# Altium PCB KNX_MCU_16CH_V1.2.PcbDoc (part 2 of 2)
Units mm, origin at the board's own origin, x right, y up, seen from the top; angles counter-clockwise.
Board outline 146.28 x 64.4 mm, 2 copper layers (F.Cu, B.Cu), stack 1.581 mm thick; 120 components, 124 nets, 397 pads, 284 vias.
Unrouted connection lines stored in the file: 62.
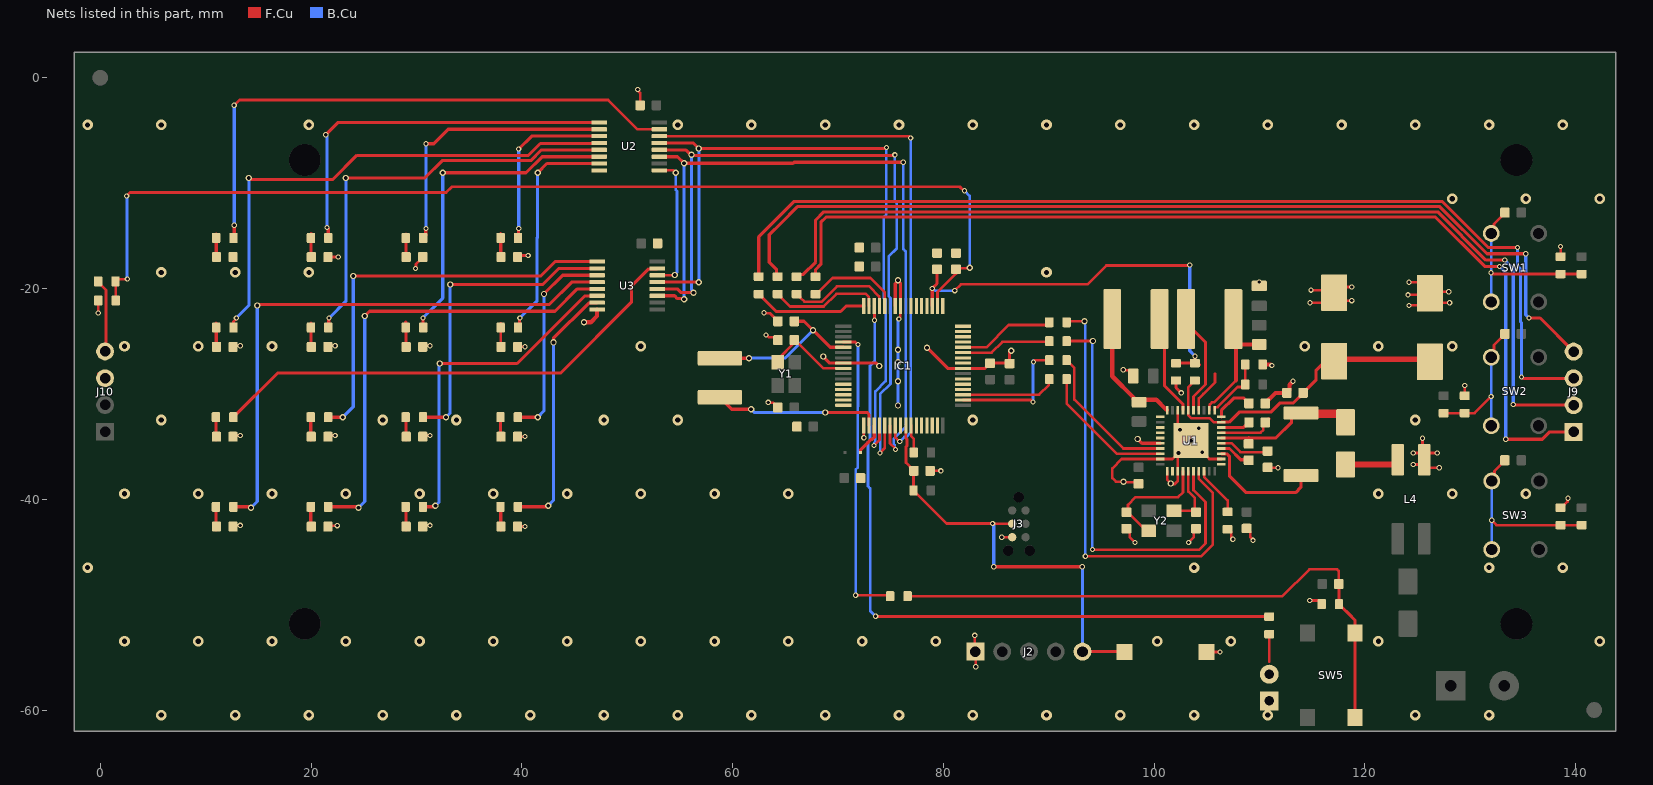
[diagram p2: the nets of this part, all layers, seen from the top]

## Via types
v1: diameter 0.5, hole 0.3, F.Cu to B.Cu, tented both sides, 133 vias
v2: diameter 1, hole 0.5, F.Cu to B.Cu, tented both sides, 88 vias
v3: diameter 0.6, hole 0.35, F.Cu to B.Cu, tented both sides, 63 vias

## Nets (pads, with @x,y where several pads share a name; then routed paths per layer and width w, separated by ;. In a path a pad name is that pad's centre, name@x,y a point inside that pad or via, vN(x,y) a via of type N, cw(c..) or ccw(c..) an arc to the next point about the centre after c; other vN are vias at no path point) (continued)
GND: C1.1 C2.1 C3.1 C4.1 C5.1 C6.1 C7.1 C8.2 C9.2 C12.1 C13.1 C14.1 C15.1 C16.1 C17.1 C18.1 C19.2 C20.2 C21.1 C22.2 C23.1 C24.1 C28.2 C30.2 C31.2 D1.1 D4.1 D5.1 D6.1 D7.1 D8.1 D9.1 D10.1 D11.1 D12.1 D13.1 D14.1 D15.1 D16.1 D17.1 D18.1 D19.1 IC1.8 IC1.17 IC1.40 IC1.57 IC1.58 J2.1 J3.5 J10.3 L4.3 R1.2 R3.1 R6.2 R7.2 R39.2 R40.1 R42.2 R44.2 SW4.2 U1.1 U1.2 U1.14 U1.18 U1.23 U1.24 U1.25 U1.26 U1.29 U1.31 U1.33 U1.41 U2.8 U3.8 | length 120.2
  F.Cu w0.25: C20.2@97.38,-42.775 97.68,-43.075 97.68,-43.6 v1(98.18,-44.1) ; v1(103.28,-44.1) 103.78,-43.6 103.78,-42.975 C19.2@103.98,-42.775
  F.Cu w0.254: J10.3@-0.2,-28.086 0.224,-28.51 J10.3@0.463,-28.51 ; v1(-0.2,-22.313) -0.195,-22.307 R44.2@-0.195,-21.147 ; D16.1@12.6,-42.587 12.713,-42.475 v1(13.285,-42.475) ; D12.1@12.6,-34.062 12.713,-33.95 v1(13.285,-33.95) ; D7.1@12.713,-25.425 v1(13.285,-25.425) ; D4.1@21.588,-17.013 v1(22.587,-17.013) v1@22.6,-17 ; D13.1@21.6,-34.062 21.713,-33.95 v1(22.285,-33.95) ; D8.1@21.6,-25.538 21.713,-25.425 v1(22.285,-25.425) ; D17.1@21.8,-42.613 21.913,-42.5 v1(22.485,-42.5) ; v1(29.913,-18.1) 29.96,-18.053 29.96,-17.69 30.423,-17.227 30.423,-17.177 D5.1@30.588,-17.013 ; D18.1@30.6,-42.587 30.713,-42.475 v1(31.285,-42.475) ; D14.1@30.6,-34.062 30.713,-33.95 v1(31.285,-33.95) ; D9.1@30.6,-25.538 30.713,-25.425 v1(31.285,-25.425) ; D6.1@39.6,-16.863 v1(40.6,-16.863) v1@40.613,-16.85 ; D19.1@39.613,-42.687 39.725,-42.575 v1(40.298,-42.575) ; D15.1@39.612,-34.162 39.725,-34.05 v1(40.297,-34.05) ; D10.1@39.612,-25.638 39.725,-25.525 v1(40.297,-25.525) ; v1(51,-1.112) 51,-1.212 51.225,-1.437 C30.2@51.225,-2.613 ; v1(63.18,-24.4) 63.247,-24.4 63.474,-24.627 64.02,-24.627 C9.2@64.293,-24.9 ; v1(63.38,-30.8) 63.427,-30.847 63.865,-30.847 63.97,-30.952 63.982,-30.952 64.318,-31.288 C8.2@64.318,-31.3 ; IC1.17@72.443,-32.989 72.451,-32.997 72.451,-34.159 v1(72.459,-34.167) ; v1(75.78,-22.9) 75.78,-22.833 75.92,-22.693 75.92,-21.662 IC1.57@75.943,-21.639 ; v1@82.967,-52.9 v1(82.98,-52.913) J2.1@82.98,-53.913 ; J2.1@83.08,-54.887 v1(83.08,-55.887) v1@83.093,-55.9 ; v1@85.538,-43.609 v1(85.551,-43.597) J3.5@86.551,-43.597 ; v1(97.08,-27.7) 97.127,-27.747 97.657,-27.747 97.98,-28.07 C15.1@97.98,-28.313 ; C17.1@98.527,-38.527 98.389,-38.388 97.154,-38.388 v3(97.092,-38.327) 97.087,-38.322 96.387,-38.322 96.037,-37.972 96.037,-37.072 96.927,-36.182 U1.29@100.601,-36.182 101.747,-36.182 U1.41@102.247,-35.682 ; U1.31@101.247,-37.327 101.247,-38.109 101.58,-38.442 v3(101.58,-38.5) ; v3@101.58,-38.572 101.937,-38.572 102.247,-38.262 U1.33@102.247,-37.327 U1.41@102.247,-35.682 ; U1.18@102.247,-31.536 102.247,-33.182 v3(102.462,-33.397) v3(103.497,-34.432) ; v3(104.247,-33.272) 104.247,-33.682 v3(103.497,-34.432) ; U1.14@104.247,-31.536 104.247,-30.433 104.68,-30 105.78,-28.9 105.78,-28.1 ; SW4.2@105.268,-54.5 v1(106.267,-54.5) v1@106.28,-54.487 ; U1.2@106.393,-36.182 105.247,-36.182 v3(104.587,-35.522) v3(103.497,-34.432) ; R40.1@106.977,-42.834 107.039,-42.834 107.325,-43.12 107.325,-43.578 107.48,-43.733 v1(107.48,-43.8) ; C18.1@108.78,-42.762 108.792,-42.762 109.128,-43.098 109.128,-43.581 109.38,-43.833 v1(109.38,-43.9) ; C16.1@109.98,-19.763 v1(109.98,-19.375) ; v1@114.78,-21.362 v1(114.793,-21.35) 115.793,-21.35 ; v1@114.88,-20.162 v1(114.893,-20.15) C22.2@115.893,-20.15 ; C22.2@117.768,-21.15 v1(118.767,-21.15) v1@118.78,-21.137 ; C22.2@117.768,-19.85 v1(118.767,-19.85) v1@118.78,-19.837 ; v1@124.08,-20.613 v1(124.093,-20.6) C28.2@125.093,-20.6 ; v1@124.18,-21.612 v1(124.193,-21.6) C28.2@125.193,-21.6 ; v1@124.18,-19.413 v1(124.193,-19.4) C28.2@125.193,-19.4 ; v1@124.58,-36.712 v1(124.593,-36.7) L4.3@125.593,-36.7 ; v1@124.58,-35.613 v1(124.593,-35.6) L4.3@125.593,-35.6 ; v1@125.468,-34.2 v1(125.48,-34.213) L4.3@125.48,-35.213 ; L4.3@125.868,-35.6 v1(126.867,-35.6) v1@126.88,-35.587 ; L4.3@126.067,-37 v1(127.067,-37) v1@127.08,-36.987 ; C28.2@126.967,-20.3 v1(127.967,-20.3) v1@127.98,-20.287 ; C28.2@127.051,-21.351 v1(128.051,-21.351) v1@128.064,-21.338 ; v1@129.468,-29.2 v1(129.48,-29.213) R6.2@129.48,-30.212 ; v1@138.568,-16 v1(138.58,-16.013) R1.2@138.58,-17.013 ; R7.2@138.58,-40.813 138.642,-40.813 139.233,-40.222 139.233,-39.947 v1(139.28,-39.9) ; U1.41@102.247,-35.682 v3(102.322,-35.607) v3(103.497,-34.432)
  F.Cu w0.3: v3(68.608,-26.457) 69.228,-27.077 IC1.8@70.518,-27.077 73.628,-27.077 v3(73.908,-27.357) ; IC1.58@75.443,-21.652 75.443,-19.538 v3@75.7,-19.281 ; v3(75.7,-19.2) v3@75.7,-19.281 ; IC1.57@75.943,-21.652 75.943,-19.525 v3@75.7,-19.281 ; v3(78.458,-25.607) 80.428,-27.577 IC1.40@81.868,-27.577 83.953,-27.577 84.448,-27.082 86.258,-27.082 86.288,-27.112 86.288,-26.077 v3(86.458,-25.907) ; v3(98.437,-34.272) 98.847,-34.682 U1.26@100.601,-34.682 ; R42.2@102.08,-28.725 102.08,-29.4 v1(102.58,-29.9) ; v1(114.78,-49.6) 115.558,-49.6 115.577,-49.618 115.652,-49.618 115.902,-49.868 R3.1@115.902,-49.943
  F.Cu w0.4: v3(45.9,-23.2) 46.55,-23.2 47.138,-22.613 U3.8@47.138,-21.987 ; R39.2@110.305,-27.2 111.08,-27.2 v1(111.18,-27.3) ; C14.1@110.555,-30.9 110.555,-30.875 111.53,-29.9 112.605,-29.9 112.855,-29.65 112.855,-29.125 v1(113.18,-28.8)
  B.Cu w0.254: v3(75.7,-31.1) 75.7,-22.9 v1(75.78,-22.9)
  other v2: 5.794,-60.476 12.794,-60.476 19.794,-60.476 26.794,-60.476 33.794,-60.476 40.794,-60.476 47.794,-60.476 54.794,-60.476 61.794,-60.476 68.794,-60.476 75.794,-60.476 82.794,-60.476 89.794,-60.476 96.794,-60.476 103.794,-60.476 110.794,-60.476 124.794,-60.476 131.794,-60.476 2.294,-53.476 9.294,-53.476 16.294,-53.476 23.294,-53.476 30.294,-53.476 37.294,-53.476 44.294,-53.476 51.294,-53.476 58.294,-53.476 65.294,-53.476 72.294,-53.476 79.294,-53.476 100.294,-53.476 107.294,-53.476 121.294,-53.476 142.294,-53.476 -1.206,-46.476 103.794,-46.476 131.794,-46.476 138.794,-46.476 2.294,-39.476 9.294,-39.476 16.294,-39.476 23.294,-39.476 30.294,-39.476 37.294,-39.476 44.294,-39.476 51.294,-39.476 58.294,-39.476 65.294,-39.476 121.294,-39.476 128.294,-39.476 135.294,-39.476 5.794,-32.476 26.794,-32.476 33.794,-32.476 47.794,-32.476 54.794,-32.476 82.794,-32.476 124.794,-32.476 2.294,-25.476 9.294,-25.476 16.294,-25.476 51.294,-25.476 114.294,-25.476 121.294,-25.476 128.294,-25.476 5.794,-18.476 12.794,-18.476 19.794,-18.476 89.794,-18.476 128.294,-11.476 135.294,-11.476 142.294,-11.476 -1.206,-4.476 5.794,-4.476 19.794,-4.476 54.794,-4.476 61.794,-4.476 68.794,-4.476 75.794,-4.476 82.794,-4.476 89.794,-4.476 96.794,-4.476 103.794,-4.476 110.794,-4.476 117.794,-4.476 124.794,-4.476 131.794,-4.476 138.794,-4.476
  other v3: 75.7,-28.8 75.7,-27 75.7,-25.8
Led_ShiftRegDATA: IC1.23 U2.14 | length 55
  F.Cu w0.25: U2.14@53.063,-5.538 76.725,-5.538 v1(76.9,-5.713) ; IC1.23@75.443,-33.002 75.443,-34.152 75.8,-34.508 v1(75.863,-34.508)
  B.Cu w0.25: v1(75.863,-34.508) 75.881,-34.508 76.314,-34.075 76.491,-34.075 76.9,-33.666 v1(76.9,-5.713)
NetC1_2: C1.2 IC1.5 L1.1 | length 17.4
  F.Cu w0.254: v1(62.98,-22.3) 63.027,-22.347 63.577,-22.347 64.305,-23.075 64.305,-23.113
  F.Cu w0.3: L1.1@58.788,-26.617 61.548,-26.617 v3(61.558,-26.607) ; C1.2@65.855,-23.1 66.78,-23.1 v3(67.63,-23.95) ; v3@67.56,-23.88 69.257,-25.577 IC1.5@70.518,-25.577
  B.Cu w0.3: v3(61.558,-26.607) 64.973,-26.607 v3(67.63,-23.95)
NetC10_1: C10.1 U1.4 | length 3.1
  F.Cu w0.3: U1.4@106.393,-35.182 107.162,-35.182 108.231,-36.251 108.931,-36.251 C10.1@108.98,-36.3
NetC10_2: C10.2 D3.1 R34.1 U1.6 | length 14.1
  F.Cu w0.3: U1.6@106.393,-34.182 111.564,-34.182 113.05,-32.696 113.05,-32.272 113.513,-31.809 R34.1@113.937,-31.809
  F.Cu w0.4: 108.979,-34.207 108.98,-34.208 C10.2@108.98,-34.725
  F.Cu w0.8: R34.1@113.937,-31.809 113.999,-31.872 117.837,-31.872 118.423,-32.457 D3.1@118.437,-32.472
NetC11_1: C11.1 U1.8 | length 2.8
  F.Cu w0.3: U1.8@106.393,-33.182 108.498,-33.182 108.655,-33.025 108.705,-33.025 108.98,-32.75 C11.1@108.98,-32.7
NetC11_2: C11.2 U1.7 | length 5.4
  F.Cu w0.25: U1.7@106.393,-33.682 110.098,-33.682 110.376,-33.404 110.376,-32.879 C11.2@110.555,-32.7 ; C11.2@110.555,-32.675 110.88,-32.35 C11.2@110.905,-32.35
NetC12_2: C12.2 U1.5 | length 5.7
  F.Cu w0.25: U1.5@106.393,-34.682 107.362,-34.682 108.205,-35.525 C12.2@110.755,-35.525
  F.Cu w0.254: 110.768,-37 v1(111.767,-37) v1@111.78,-36.987
NetC14_2: C14.2 U1.10 | length 3.9
  F.Cu w0.3: U1.10@106.393,-32.182 106.393,-31.562 107.555,-30.4 108.505,-30.4 108.68,-30.575 108.705,-30.575 109.005,-30.875 C14.2@109.005,-30.9
NetC25_1: C25.1 R3.2 R99.1 SW5.1 | length 57.5
  F.Cu w0.25: R99.1@76.605,-49.2 112.18,-49.2 114.733,-46.647 117.38,-46.647 117.527,-46.793 117.527,-48.043 117.552,-48.068 R3.2@117.552,-49.943 ; R3.2@117.877,-50.268 118.473,-50.865
  F.Cu w0.3: R3.2@117.552,-49.943 117.552,-50.018 117.802,-50.268 117.877,-50.268 118.473,-50.865 119.07,-51.462 SW5.1@119.07,-52.7 SW5.1@119.07,-60.7
NetC26_2: C26.2 R1.1 R2.2 SW1.3 SW1.4 | length 17.7
  F.Cu w0.254: v1(131.98,-18.5) 132.105,-18.625 R1.1@138.58,-18.625 R2.2@140.58,-18.625 ; SW1.4@131.998,-14.767 132.256,-14.509 132.256,-13.874 133.305,-12.825 C26.2@133.305,-12.8
  B.Cu w0.254: SW1.3@131.998,-21.267 131.989,-21.258 131.989,-18.509 v1(131.98,-18.5) 131.989,-18.491 131.989,-14.776 SW1.4@131.998,-14.767
NetC27_2: C27.2 R4.2 R6.1 SW2.3 SW2.4 | length 14.4
  F.Cu w0.254: R4.2@127.48,-31.825 R6.1@129.48,-31.825 130.405,-31.825 v1(131.989,-30.241) ; SW2.4@131.998,-26.517 132.256,-26.259 132.256,-25.374 133.305,-24.325 C27.2@133.305,-24.3
  B.Cu w0.254: SW2.3@131.998,-32.999 131.998,-30.25 v1(131.989,-30.241) 131.998,-30.232 SW2.4@131.998,-26.517
NetC29_2: C29.2 R5.2 R7.1 SW3.3 SW3.4 | length 17.7
  F.Cu w0.254: v1(132.039,-41.991) 132.498,-42.45 R7.1@138.58,-42.45 R5.2@140.58,-42.45 ; SW3.4@132.048,-38.267 132.306,-38.009 132.306,-37.324 133.305,-36.325 C29.2@133.305,-36.3
  B.Cu w0.254: SW3.3@132.048,-44.749 132.048,-42 v1(132.039,-41.991) 132.048,-41.982 SW3.4@132.048,-38.267
NetD1_2: D1.2 R8.2 | length 2.2
  F.Cu w0.3: R8.2@10.988,-14.9 R8.2@11.006,-14.919 ; R8.2@11.006,-14.819 11.006,-16.994 D1.2@11.025,-17.013
NetD3_2: D3.2 L4.4 | length 5.2
  F.Cu w0.6: D3.2@118.18,-36.7 122.83,-36.7 123.13,-36.4 L4.4@123.13,-36.25
NetD4_2: D4.2 R9.2 | length 2.2
  F.Cu w0.3: R9.2@19.988,-14.8 20.006,-14.819 20.006,-16.994 D4.2@20.025,-17.013
NetD5_2: D5.2 R10.2 | length 2.2
  F.Cu w0.3: R10.2@29.006,-14.819 29.006,-16.994 D5.2@29.025,-17.013
NetD6_2: D6.2 R11.2 | length 2.2
  F.Cu w0.3: R11.2@37.988,-14.8 38.006,-14.819 38.006,-16.994 D6.2@38.025,-17.013
NetD7_2: D7.2 R12.2 | length 2.2
  F.Cu w0.3: R12.2@10.988,-23.3 11.006,-23.319 11.006,-25.494 D7.2@11.025,-25.512
NetD8_2: D8.2 R13.2 | length 2.2
  F.Cu w0.3: R13.2@19.988,-23.3 20.006,-23.319 20.006,-25.494 D8.2@20.025,-25.512
NetD9_2: D9.2 R14.2 | length 2.2
  F.Cu w0.3: 28.988,-23.2 29.006,-23.219 R14.2@29.006,-23.7 ; R14.2@29.006,-23.8 29.006,-25.494 D9.2@29.025,-25.512
NetD10_2: D10.2 R15.2 | length 2.2
  F.Cu w0.254: R15.2@37.988,-23.3 38.006,-23.319 38.006,-25.494 D10.2@38.025,-25.512
NetD11_2: D11.2 R26.2 | length 2.6
  F.Cu w0.25: 110.93,-55.4 R26.2@110.93,-52.795
NetD12_2: D12.2 R16.2 | length 2.2
  F.Cu w0.3: D12.2@10.975,-34.388 R16.2@10.975,-32.213
NetD13_2: D13.2 R17.2 | length 2.2
  F.Cu w0.3: D13.2@19.975,-34.388 R17.2@19.975,-32.213
NetD14_2: D14.2 R18.2 | length 2.2
  F.Cu w0.3: D14.2@29,-34.388 R18.2@29,-32.213
NetD15_2: D15.2 R19.2 | length 2.2
  F.Cu w0.3: D15.2@37.975,-34.388 R19.2@37.975,-32.213
NetD16_2: D16.2 R20.2 | length 2.2
  F.Cu w0.3: D16.2@10.975,-42.888 R20.2@10.975,-40.713
NetD17_2: D17.2 R21.2 | length 2.2
  F.Cu w0.3: D17.2@19.975,-42.888 R21.2@19.975,-40.713
NetD18_2: D18.2 R22.2 | length 2.2
  F.Cu w0.3: D18.2@29,-42.888 R22.2@29,-40.713
NetD19_2: D19.2 R23.2 | length 2.2
  F.Cu w0.3: D19.2@38,-42.888 R23.2@38,-40.713
NetJ9_1: J9.1 R91.2 | length 95.3
  F.Cu w0.3: R91.2@67.88,-18.875 67.88,-18.197 68.38,-17.697 68.38,-13.707 68.862,-13.225 126.709,-13.225 131.384,-17.9 v1(132.78,-17.9) ; v1(133.38,-34.3) 136.842,-34.3 137.538,-33.604 J9.1@139.816,-33.604
  B.Cu w0.3: v1(132.78,-17.9) 132.78,-17.902 133.38,-18.502 v1(133.38,-34.3)
NetJ9_2: J9.2 R92.2 | length 93.8
  F.Cu w0.3: R92.2@66.08,-18.875 66.299,-18.656 66.714,-18.656 67.88,-17.49 67.88,-13.5 68.655,-12.725 126.916,-12.725 131.491,-17.3 v1(133.28,-17.3) ; v1(134.08,-31) 134.144,-31.064 J9.2@139.816,-31.064
  B.Cu w0.3: v1(133.28,-17.3) 134.08,-18.1 v1(134.08,-31)
NetJ9_3: J9.3 R93.2 | length 96.4
  F.Cu w0.3: R93.2@62.48,-18.875 62.48,-15.1 65.855,-11.725 127.33,-11.725 131.705,-16.1 v1(134.48,-16.1) ; v1(134.88,-28.4) 135.004,-28.524 J9.3@139.816,-28.524
  B.Cu w0.3: v1(134.48,-16.1) 134.48,-17.793 134.78,-18.093 134.78,-23.169 134.88,-23.269 v1(134.88,-28.4)
NetJ9_4: J9.4 R94.2 | length 90.8
  F.Cu w0.3: R94.2@64.28,-18.875 64.181,-18.776 64.181,-18.201 63.48,-17.5 63.48,-14.9 64.605,-13.775 66.155,-12.225 127.123,-12.225 131.598,-16.7 v1(135.28,-16.7) ; v1(135.58,-22.8) 136.632,-22.8 J9.4@139.816,-25.984
  B.Cu w0.3: v1(135.28,-16.7) 135.28,-22.5 v1(135.58,-22.8)
NetJP1_2: IC1.19 JP1.2 | length 3.2
  F.Cu w0.3: JP1.2@72.133,-35.557 72.133,-35.341 73.174,-34.3 73.268,-34.3 73.443,-34.124 IC1.19@73.443,-33.002
NetL1_2: IC1.18 L1.2 | length 15.9
  F.Cu w0.3: L1.2@58.788,-30.317 59.928,-31.457 v3(61.758,-31.457) ; v3(68.808,-31.757) 72.758,-31.757 72.943,-31.942 IC1.18@72.943,-33.002
  B.Cu w0.3: v3(61.758,-31.457) 62.058,-31.757 v3(68.808,-31.757)
NetL2_1: L2.1 U1.17 | length 9.5
  F.Cu w0.3: L2.1@100.53,-23 100.98,-23.45 100.98,-29.2 102.747,-30.967 U1.17@102.747,-31.536
NetL2_2: L2.2 R35.1 U1.20 | length 12.1
  F.Cu w0.4: L2.2@96.03,-23 96.03,-28.325 98.08,-30.375 98.08,-30.475 98.194,-30.589 98.382,-30.589 R35.1@98.58,-30.787 ; R35.1@98.426,-30.545 100.205,-30.545 101.095,-31.434 ; 101.095,-31.434 U1.20@101.197,-31.536
NetL3_1: L3.1 U1.15 | length 9.6
  F.Cu w0.3: L3.1@102.98,-23.2 104.88,-25.1 104.88,-29.11 103.747,-30.243 U1.15@103.747,-31.536
NetL3_2: L3.2 R36.1 U1.12 | length 12.3
  F.Cu w0.25: U1.12@105.247,-31.536 105.249,-31.534 105.249,-31.157 105.293,-31.113 105.293,-30.997 105.485,-30.805 105.675,-30.805 107.77,-28.71
  F.Cu w0.4: L3.2@107.53,-22.9 107.53,-24.662 L3.2@107.77,-24.902 ; 107.77,-28.71 L3.2@107.77,-24.902 ; R36.1@109.98,-25.312 108.18,-25.312 L3.2@107.77,-24.902
NetR8_1: R8.1 U2.15 | length 54.4
  F.Cu w0.254: v1(12.7,-2.613) 13.213,-2.1 48.188,-2.1 50.975,-4.888 U2.15@53.063,-4.888
  F.Cu w0.3: R8.1@12.638,-15.2 12.713,-15.125 v1(12.713,-14)
  B.Cu w0.3: v1(12.7,-2.613) 12.706,-2.619 12.706,-13.994 v1(12.713,-14)
NetR9_1: R9.1 U2.1 | length 36.3
  F.Cu w0.3: v1(21.4,-5.413) 22.575,-4.238 U2.1@47.338,-4.238 ; v1(21.513,-14.2) 21.638,-14.325 R9.1@21.638,-15.2
  B.Cu w0.3: v1(21.4,-5.413) 21.4,-5.467 21.513,-5.579 v1(21.513,-14.2)
NetR10_1: R10.1 U2.2 | length 26.1
  F.Cu w0.3: R10.1@30.638,-15.2 30.888,-14.95 30.888,-14.325 v1(30.913,-14.3) ; v1(30.9,-6.263) 31.65,-6.263 33.025,-4.888 U2.2@47.338,-4.888
  B.Cu w0.3: v1(30.9,-6.263) 30.906,-6.269 30.906,-14.294 v1(30.913,-14.3)
NetR11_1: R11.1 U2.3 | length 16.6
  F.Cu w0.3: R11.1@39.638,-15.2 39.675,-15.162 39.675,-14.337 v1(39.713,-14.3) ; v1(39.7,-6.763) 40.925,-5.538 U2.3@47.338,-5.538
  B.Cu w0.3: v1(39.7,-6.763) 39.706,-6.769 39.706,-14.294 v1(39.713,-14.3)
NetR12_1: R12.1 U2.4 | length 49.1
  F.Cu w0.3: R12.1@12.638,-23.3 12.638,-23.129 12.913,-22.854 v1(12.913,-22.8) ; v3(14.1,-9.513) 14.181,-9.513 14.319,-9.65 22.063,-9.65 24.35,-7.363 40.636,-7.363 41.761,-6.238 47.288,-6.238 U2.4@47.338,-6.188
  B.Cu w0.3: v1(12.913,-22.8) 14.1,-21.612 v3(14.1,-9.513)
NetR13_1: R13.1 U2.5 | length 40
  F.Cu w0.3: R13.1@21.638,-23.7 21.675,-23.663 21.675,-22.837 v1(21.712,-22.8) ; v3(23.3,-9.513) 30.8,-9.513 32.45,-7.863 40.843,-7.863 41.868,-6.838 U2.5@47.338,-6.838
  B.Cu w0.3: v1(21.712,-22.8) 23.3,-21.212 v3(23.3,-9.513)
NetR14_1: R14.1 U2.6 | length 30.5
  F.Cu w0.3: v1(30.612,-22.8) 30.638,-22.825 R14.1@30.638,-23.3 ; v3(32.5,-9.013) 40.4,-9.013 41.925,-7.488 U2.6@47.338,-7.488
  B.Cu w0.3: v1(30.612,-22.8) 32.5,-20.912 v3(32.5,-9.013)
NetR15_1: R15.1 U2.7 | length 21.7
  F.Cu w0.3: R15.1@39.638,-23.7 39.774,-23.563 39.774,-22.838 v1(39.813,-22.8) ; v3(41.5,-9.013) 42.375,-8.138 U2.7@47.338,-8.138
  B.Cu w0.3: v1(39.813,-22.8) 41.45,-21.162 41.45,-15.182 41.5,-15.132 v3(41.5,-9.013)
NetR16_1: R16.1 U3.15 | length 47
  F.Cu w0.3: R16.1@12.625,-32.213 16.825,-28.013 43.687,-28.013 50.4,-21.3 50.4,-19.797 52.059,-18.137 52.813,-18.137 U3.15@52.863,-18.088
NetR17_1: R17.1 U3.1 | length 38.9
  F.Cu w0.3: R17.1@21.625,-32.213 v3(23,-32.213) ; v3(24,-18.812) 41.8,-18.812 43.175,-17.438 U3.1@47.138,-17.438
  B.Cu w0.3: v3(23,-32.213) 24,-31.213 v3(24,-18.812)
NetR18_1: R18.1 U3.2 | length 29.5
  F.Cu w0.3: R18.1@30.625,-32.213 v3(32.8,-32.213) ; v3(33.2,-19.613) 42,-19.613 43.525,-18.088 U3.2@47.138,-18.088
  B.Cu w0.3: v3(32.8,-32.213) 33.2,-31.813 v3(33.2,-19.613)
NetR19_1: R19.1 U3.3 | length 19.6
  F.Cu w0.3: R19.1@39.625,-32.213 v3(41.5,-32.213) ; v3(42.1,-20.513) 43.875,-18.738 U3.3@47.138,-18.738
  B.Cu w0.3: v3(41.5,-32.213) 42.1,-31.613 v3(42.1,-20.513)
NetR20_1: R20.1 U3.4 | length 54.3
  F.Cu w0.3: R20.1@12.625,-40.713 14.119,-40.713 14.219,-40.813 v3(14.3,-40.813) ; v3(14.9,-21.613) 15,-21.513 42.6,-21.513 44.725,-19.387 U3.4@47.138,-19.387
  B.Cu w0.3: v3(14.3,-40.813) 14.9,-40.213 v3(14.9,-21.613)
NetR21_1: R21.1 U3.5 | length 44.5
  F.Cu w0.3: R21.1@21.625,-40.713 24.319,-40.713 24.419,-40.813 v3(24.5,-40.813) ; v3(25.1,-22.612) 25.55,-22.163 43.15,-22.163 45.275,-20.038 U3.5@47.138,-20.038
  B.Cu w0.3: v3(24.5,-40.813) 25.1,-40.213 v3(25.1,-22.612)
NetR22_1: R22.1 U3.6 | length 32.5
  F.Cu w0.3: R22.1@30.625,-40.713 31.619,-40.713 31.719,-40.613 v3(31.8,-40.613) ; v3(32.2,-27.113) 39.559,-27.113 45.95,-20.721 47.104,-20.721 U3.6@47.138,-20.687
  B.Cu w0.3: v3(31.8,-40.613) 32.15,-40.263 32.15,-27.162 v3(32.2,-27.113)
NetR23_1: R23.1 U3.7 | length 24.6
  F.Cu w0.3: R23.1@39.625,-40.713 42.319,-40.713 42.419,-40.613 v3(42.5,-40.613) ; v3(43,-25.112) 43,-24.722 46.334,-21.388 47.088,-21.388 U3.7@47.138,-21.338
  B.Cu w0.3: v3(42.5,-40.613) 43,-40.113 v3(43,-25.112)
NetR34_2: R34.2 U1.3 | length 11.7
  F.Cu w0.3: U1.3@106.393,-35.682 106.746,-35.682 106.769,-35.705 106.944,-35.705 107.149,-35.91 107.149,-37.769 108.752,-39.372 113.437,-39.372 113.937,-38.872 R34.2@113.937,-37.514
NetR38_2: R38.2 R39.1 U1.11 | length 6
  F.Cu w0.25: U1.11@105.747,-31.536 105.747,-31.257 105.749,-31.255 106.028,-31.255 107.933,-29.35 108.405,-29.35 R38.2@108.655,-29.1 R39.1@108.655,-27.2
NetR40_2: R40.2 U1.38 | length 4.8
  F.Cu w0.25: U1.38@104.747,-37.327 104.747,-37.882 106.977,-40.112 R40.2@106.977,-41.197
NetU2_9: U2.9 U3.14 | length 13.1
  F.Cu w0.254: U3.14@52.863,-18.738 52.875,-18.725 54.488,-18.725 v3(54.5,-18.713) ; U2.9@53.063,-8.788 54.375,-8.788 v3(54.6,-9.013)
  B.Cu w0.254: v3(54.5,-18.713) 54.727,-18.486 54.727,-10.753 54.6,-10.626 v3(54.6,-9.013)
P000: IC1.64 R93.1 | length 10.9
  F.Cu w0.3: R93.1@62.48,-20.525 62.555,-20.525 62.805,-20.775 62.805,-20.85 64.13,-22.175 70.259,-22.175 70.782,-21.652 IC1.64@72.443,-21.652
P001: IC1.63 R94.1 | length 10.7
  F.Cu w0.25: R94.1@64.28,-20.525 64.355,-20.525 64.63,-20.8 64.63,-20.875 65.455,-21.7 68.653,-21.7 69.853,-20.5 72.654,-20.5 72.918,-20.764 72.918,-21.627 IC1.63@72.943,-21.652
P003: IC1.61 R92.1 | length 10.1
  F.Cu w0.25: R92.1@66.08,-20.525 66.155,-20.525 66.43,-20.8 66.43,-20.875 66.805,-21.25 68.466,-21.25 69.916,-19.8 72.98,-19.8 73.918,-20.738 73.918,-21.627 IC1.61@73.943,-21.652
P004: IC1.60 R91.1 | length 9
  F.Cu w0.25: R91.1@67.88,-20.525 67.955,-20.525 69.48,-19 73.08,-19 74.443,-20.363 IC1.60@74.443,-21.652
P012: IC1.55
P013: IC1.54
P014: IC1.53
P015: IC1.52
P100: IC1.48
P101: IC1.47
P102: IC1.46
P103: IC1.45
P104: IC1.44 R96.2 | length 9
  F.Cu w0.25: IC1.44@81.868,-25.577 84.088,-25.577 86.208,-23.457 R96.2@90.008,-23.457
P105: IC1.43 R95.2 | length 8.6
  F.Cu w0.25: IC1.43@81.868,-26.077 84.588,-26.077 85.608,-25.057 R95.2@90.008,-25.057
P106: IC1.42
P107: IC1.41
P109: IC1.34 R97.2 | length 12.3
  F.Cu w0.25: IC1.34@81.868,-30.577 88.328,-30.577 v1(88.508,-30.757) ; v1(88.555,-26.97) 88.725,-26.8 R97.2@90.055,-26.8
  B.Cu w0.25: v1(88.508,-30.757) 88.508,-26.857 v1@88.608,-26.857
P110: IC1.35 R98.2 | length 9.3
  F.Cu w0.25: IC1.35@81.868,-30.077 89.088,-30.077 90.008,-29.157 R98.2@90.008,-28.357
P111: IC1.36
P112: IC1.37
P113: IC1.38
P200: IC1.27
P201/MD: IC1.26 R33.1 | length 2.7
  F.Cu w0.25: IC1.26@76.943,-33.002 76.968,-33.027 76.968,-34.024 77.183,-34.239 R33.1@77.183,-35.557
P204: IC1.24
P301: IC1.31
P302: IC1.30
P303: IC1.29
P304: IC1.28
P407: IC1.16
P408: IC1.15
P409: IC1.14
P411: IC1.12
P413: IC1.13
P500: IC1.49
Relay_ADC: C24.2 IC1.50 R43.2 R44.1 | length 104
  F.Cu w0.254: R44.1@1.461,-21.129 1.451,-21.119 1.451,-19.329 R43.2@1.441,-19.319 1.627,-19.133 2.517,-19.133 v1(2.564,-19.086) ; v1(2.5,-11.212) 2.823,-10.89 32.823,-10.89 33.373,-10.339 81.56,-10.339 81.933,-10.713 v1(82,-10.713) ; IC1.50@79.443,-21.652 79.443,-20.35 81.2,-18.593 81.2,-18.187 81.309,-18.079 82.434,-18.079 v3(82.5,-18.013)
  B.Cu w0.254: v1(2.5,-11.212) 2.532,-11.245 2.532,-19.054 v1(2.564,-19.086) ; v1(82,-10.713) 82.5,-11.212 v3(82.5,-18.013)
RELAY_CAP_ADC: J10.4 R43.1 | length 7
  F.Cu w0.254: R43.1@-0.209,-19.319 -0.209,-19.394 0.538,-20.141 0.538,-25.882 J10.4@0.45,-25.97
RES: C21.2 IC1.25 J2.5 J3.3 R32.1 SW4.1 | length 42.8
  F.Cu w0.254: IC1.25@76.443,-33.002 76.443,-34.209 76.551,-34.317 76.551,-34.91 76.456,-35.005 76.456,-36.526 77.147,-37.217 77.173,-37.217 77.173,-38.817 R32.1@77.173,-39.157 80.317,-42.3 v1(84.68,-42.3) ; 78.768,-37.3 v1(79.767,-37.3) v1@79.78,-37.287 ; v1@84.68,-42.327 J3.3@86.538,-42.327
  F.Cu w0.3: v1(84.78,-46.4) v1(93.18,-46.4) ; J2.5@93.208,-54.457 97.137,-54.457 SW4.1@97.18,-54.5
  B.Cu w0.3: v1(84.68,-42.3) 84.68,-42.354 84.78,-42.454 v1(84.78,-46.4) ; v1(93.18,-46.4) 93.208,-46.428 J2.5@93.208,-54.457
RESETb: R96.1 U1.37 | length 43.7
  F.Cu w0.25: R96.1@91.705,-23.2 91.792,-23.113 v3(93.405,-23.113) ; v1(93.48,-45.4) 104.48,-45.4 105.58,-44.3 105.58,-39.401 104.247,-38.068 U1.37@104.247,-37.327
  B.Cu w0.25: v1(93.48,-45.4) 93.48,-39.372 93.48,-23.496
SAVEb: R95.1 U1.36 | length 40.5
  F.Cu w0.25: R95.1@91.705,-25 91.732,-24.973 v3(94.197,-24.973) ; v1@94.15,-44.8 104.28,-44.8 104.88,-44.2 104.88,-40.264 103.747,-39.131 U1.36@103.747,-37.327
  B.Cu w0.25: v1(94.15,-44.755) v3@94.15,-25.03
SDI/RXD: R97.1 U1.27 | length 14.2
  F.Cu w0.25: R97.1@91.705,-26.8 91.705,-26.875 91.98,-27.15 92.055,-27.15 92.43,-27.525 92.43,-30.532 97.08,-35.182 U1.27@100.601,-35.182
SDO/TXD: R98.1 U1.28 | length 13.2
  F.Cu w0.25: R98.1@91.705,-28.6 91.705,-30.925 96.462,-35.682 U1.28@100.601,-35.682
ShiftReg_Latch: IC1.21 U2.12 U3.12 | length 71.3
  F.Cu w0.254: v1(74,-35.6) 74,-35.595 74.443,-35.151 IC1.21@74.443,-33.002
  F.Cu w0.3: U3.12@52.863,-20.038 54.751,-20.038 55.076,-20.363 56.25,-20.363 v3(56.3,-20.413) ; U2.12@53.063,-6.838 55.544,-6.838 56.069,-7.362 75.296,-7.362 75.346,-7.312 v1(75.4,-7.312)
  B.Cu w0.254: v1(74,-35.6) 74,-30.025 74.985,-29.039 74.985,-20.89 74.816,-20.721 74.816,-16.969 75.58,-16.206 75.58,-11.882 75.4,-11.702 v1(75.4,-7.312)
  B.Cu w0.3: v3(56.1,-7.312) 56.1,-20.131 56.3,-20.331 v3(56.3,-20.413)
ShiftReg_{\O\E\}\: IC1.20 U2.13 U3.13 | length 69.5
  F.Cu w0.25: v1(73.423,-34.9) 73.423,-34.88 73.943,-34.36 IC1.20@73.943,-33.002
  F.Cu w0.3: U3.13@52.863,-19.387 56.775,-19.387 v3(56.8,-19.413) ; U2.13@53.063,-6.188 56.264,-6.188 56.789,-6.713 74.446,-6.713 74.546,-6.613 v1(74.6,-6.613)
  B.Cu w0.25: v1(73.423,-34.9) 73.471,-34.852 73.471,-34.61 73.548,-34.533 73.548,-29.769 74.533,-28.784 74.533,-21.078 74.364,-20.909 74.364,-13.202 74.6,-12.967 v1(74.6,-6.613)
  B.Cu w0.3: v3(56.8,-19.413) v3(56.8,-6.713)
ShiftRegCLK: IC1.22 U2.11 U3.11 | length 69.4
  F.Cu w0.25: IC1.22@74.943,-33.002 74.943,-34.688 75.453,-35.197 v1(75.453,-35.265)
  F.Cu w0.3: U3.11@52.863,-20.687 54.5,-20.687 54.768,-20.955 55.343,-20.955 v3(55.4,-21.013) ; U2.11@53.063,-7.488 54.775,-7.488 v3(55.4,-8.113) 65.744,-8.113 65.844,-8.013 v1(76.2,-8.013)
  B.Cu w0.25: v1(75.453,-35.265) 75.405,-35.217 75.405,-34.863 75.288,-34.746 75.288,-34.27 76.43,-33.128 76.43,-16.484 76.2,-16.254 v1(76.2,-8.013)
  B.Cu w0.3: v3(55.4,-21.013) v3(55.4,-8.113)
"uC CLK": U1.32
User_BTN: IC1.4 R99.2 | length 28.5
  F.Cu w0.25: IC1.4@70.518,-25.077 71.638,-25.077 71.861,-25.3 v1(71.9,-25.3) ; v1(71.68,-49.1) R99.2@74.855,-49.1
  B.Cu w0.25: v1(71.68,-49.1) 71.68,-37.167 71.884,-36.962 71.884,-31.197 71.9,-31.181 v1(71.9,-25.3)
User_LED: IC1.62 R26.1 | length 67.4
  F.Cu w0.254: IC1.62@73.443,-21.652 73.462,-21.67 73.462,-22.984 v1(73.48,-23.002) ; v1(73.58,-51.1) 73.603,-51.122 110.908,-51.122 R26.1@110.93,-51.145
  B.Cu w0.254: v1(73.48,-23.002) 73.48,-26.899 73.036,-27.342 73.036,-34.406 72.846,-34.596 72.846,-38.75 73.057,-38.961 73.057,-50.577 v1(73.58,-51.1)
VFILT: C13.2 C22.1 C28.1 R41.1 U1.9 U1.16 | length 29.3
  F.Cu w0.254: R41.1@103.88,-28.725 103.805,-28.725 103.532,-28.998 103.532,-29.073 103.247,-29.358 U1.16@103.247,-31.536 103.247,-32.032 103.531,-32.316 105.296,-32.316 105.662,-32.682 U1.9@106.393,-32.682
  F.Cu w0.3: U1.9@106.393,-32.682 107.117,-32.682 108.074,-31.725 111.084,-31.725 111.963,-30.847 113.233,-30.847 114.155,-29.925 114.155,-29.9 114.155,-29.875 115.38,-28.65 115.38,-27.75 C22.1@116.48,-26.65
  F.Cu w0.5: C22.1@116.38,-26.8 C22.1@116.43,-26.85 ; C22.1@116.53,-26.7 125.53,-26.7 C28.1@125.58,-26.75
VFILT_ADC: C23.2 IC1.51 R41.2 R42.1 | length 41.1
  F.Cu w0.254: v1(81.08,-20.2) 81.68,-19.6 93.68,-19.6 95.466,-17.815 103.34,-17.815 v1(103.38,-17.775)
  F.Cu w0.3: IC1.51@78.943,-21.652 v1(78.943,-19.987) 79.4,-19.53 79.4,-18.213 ; R42.1@102.28,-27.075 103.73,-27.075 103.88,-27.225 R41.2@104.284,-27.225 ; R41.2@103.88,-27.075 v1(103.88,-26.42)
  B.Cu w0.254: v1(78.943,-19.987) 79.01,-19.987 79.224,-20.2 v1(81.08,-20.2)
  B.Cu w0.3: v1(103.38,-17.775) 103.38,-25.92 v1(103.88,-26.42) 103.88,-26.742
XCLKC: U1.21
XTAL: C9.1 IC1.9 Y1.1 | length 8.2
  F.Cu w0.25: Y1.1@64.288,-26.937 64.288,-26.712 65.943,-25.057 66.108,-25.057 68.628,-27.577 IC1.9@70.518,-27.577
XTAL1: C19.1 U1.35 Y2.1 | length 6.2
  F.Cu w0.25: Y2.1@101.887,-41.072 103.692,-41.072 103.867,-41.247 103.867,-39.887 103.247,-39.267 U1.35@103.247,-37.327
XTAL2: C20.1 U1.34 Y2.3 | length 11.1
  F.Cu w0.25: Y2.3@99.487,-42.972 99.252,-42.972 97.527,-41.247 97.527,-40.52 98.247,-39.8 102.28,-39.8 102.747,-39.333 U1.34@102.747,-37.327
pads on no net: H1.Un1 H2.Un1 H3.Un1 H4.Un1 IC1.6 IC1.7 J3.6 J3.Un1 J3.Un2 J3.Un3 U1.22 U1.39 U3.9 Y1.3 Y1.4 Y2.2 Y2.4

## Polygon pours and split planes (outlines as drawn)
GND on F.Cu "GND_L01_P000" (solid, remove dead copper, pour order 0): -4.9,-63.2 145.4,-63.2 145.4,3.6 -4.9,3.6
GND on B.Cu "GND_L02_P001" (solid, remove dead copper, pour order 1): -4.9,-63.2 145.4,-63.2 145.4,3.6 -4.9,3.6

## Keep-outs
Keep-Out Layer:
  the board outline again, w0.254

## Other copper
F.Cu:
  pour cut-out: 143.98,-62.3 143.98,-57.6 139.33,-57.6 139.33,-62.3
  pour cut-out: 2.2,-2.3 2.2,2.4 -2.45,2.4 -2.45,-2.3
  text "BY" at -2.1,-61.6 h3
B.Cu:
  pour cut-out: 143.98,-62.3 143.98,-57.6 139.33,-57.6 139.33,-62.3
  pour cut-out: 2.2,-2.3 2.2,2.4 -2.45,2.4 -2.45,-2.3
  text "BY" at 1.4,-61.6 h3

## Silkscreen, mask and mechanical layers (free items; w line width, h text height)
F.SilkS:
  text "KNX_MCU_16CH_V1.2" at 127.48,0.5 h3
  text "27.07.2026" at 138.18,-1.1 h2
  text "DIO" at 90.28,-41.2 h0.7
  text "3V3" at 83.98,-41.3 h0.7
  text "RES" at 83.78,-42.5 h0.7
  text "CLK" at 90.28,-42.5 h0.7
  text "GND" at 83.88,-43.8 h0.7
  text "GND" at 83.28,-52.1 h0.7 r90
  text "DIO" at 90.88,-52.1 h0.7 r90
  text "RES" at 93.42,-52.1 h0.7 r90
  text "3V3" at 85.68,-52.2 h0.7 r90
  text "CLK" at 88.28,-52.2 h0.7 r90
B.SilkS:
  text "KNX_MCU_16CH_V1.2" at 143.42,0.5 h3
  text "27.07.2026" at 132.72,-1.1 h2
Edge.Cuts:
  circle w0.254: c134.4,-51.8 r1.5
  circle w0.254: c19.39,-51.8 r1.5
  circle w0.254: c19.39,-7.8 r1.5
  circle w0.254: c134.4,-7.8 r1.5
  lines w0.254: -2.45,-62 143.83,-62 143.83,2.4 -2.45,2.4 -2.45,-62

## Text inside footprints (layer, text, board x,y; h text height)
J3: Cmts.User "KEEPOUT" at 87.287,-42.747 h0.4 r90
U1: F.Fab "*" at 106.108,-36.814 h1 r180; F.Fab "*" at 106.108,-36.814 h1 r180; F.SilkS "*" at 107.556,-36.814 h1 r180; F.SilkS "*" at 107.556,-36.814 h1 r180